# EAGLE board bl_dora2 (EAGLE 9.4.2)
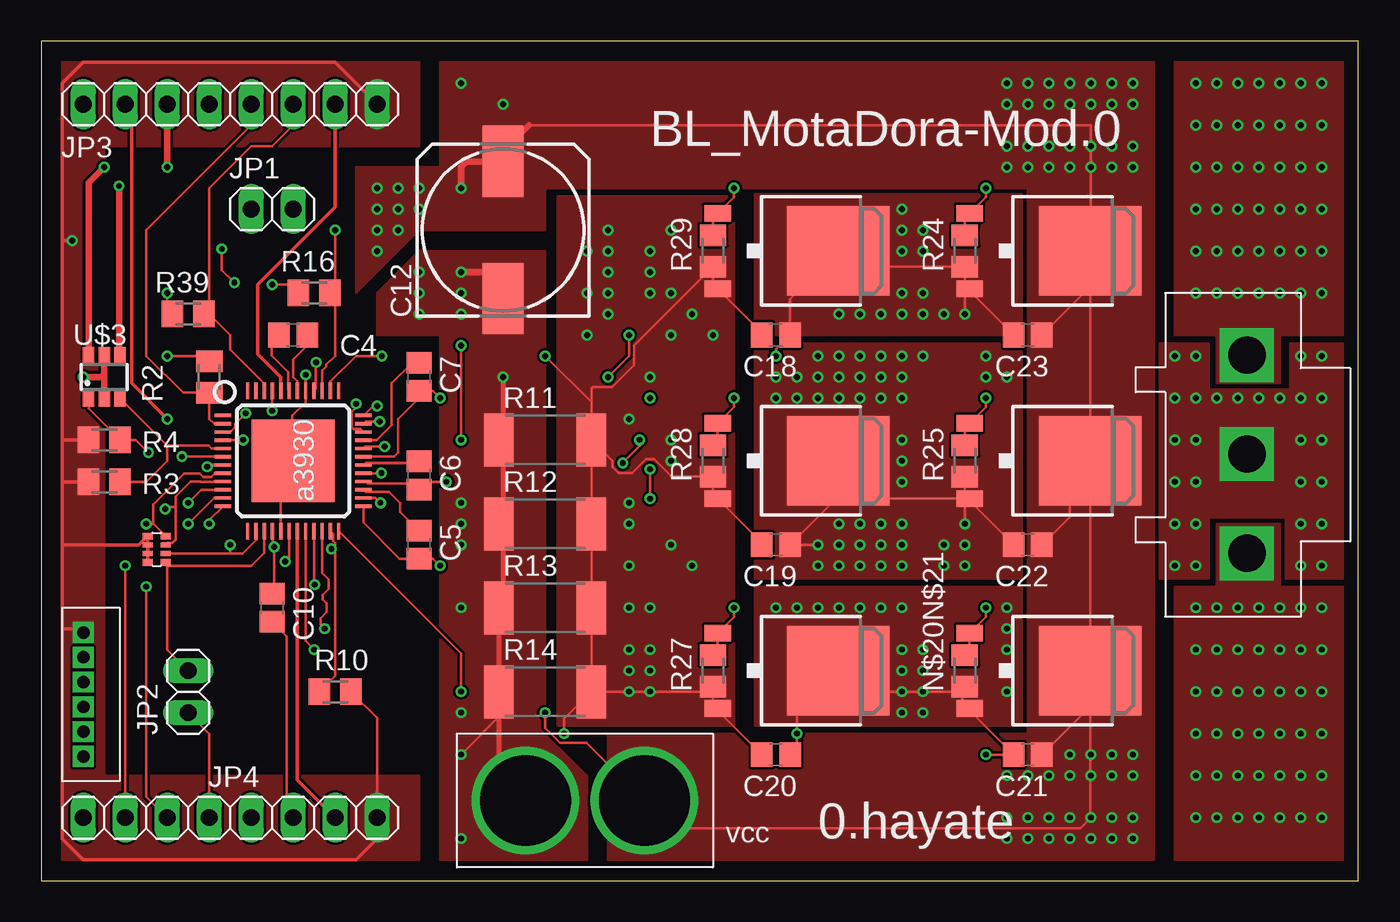
[diagram p0: board, top side]
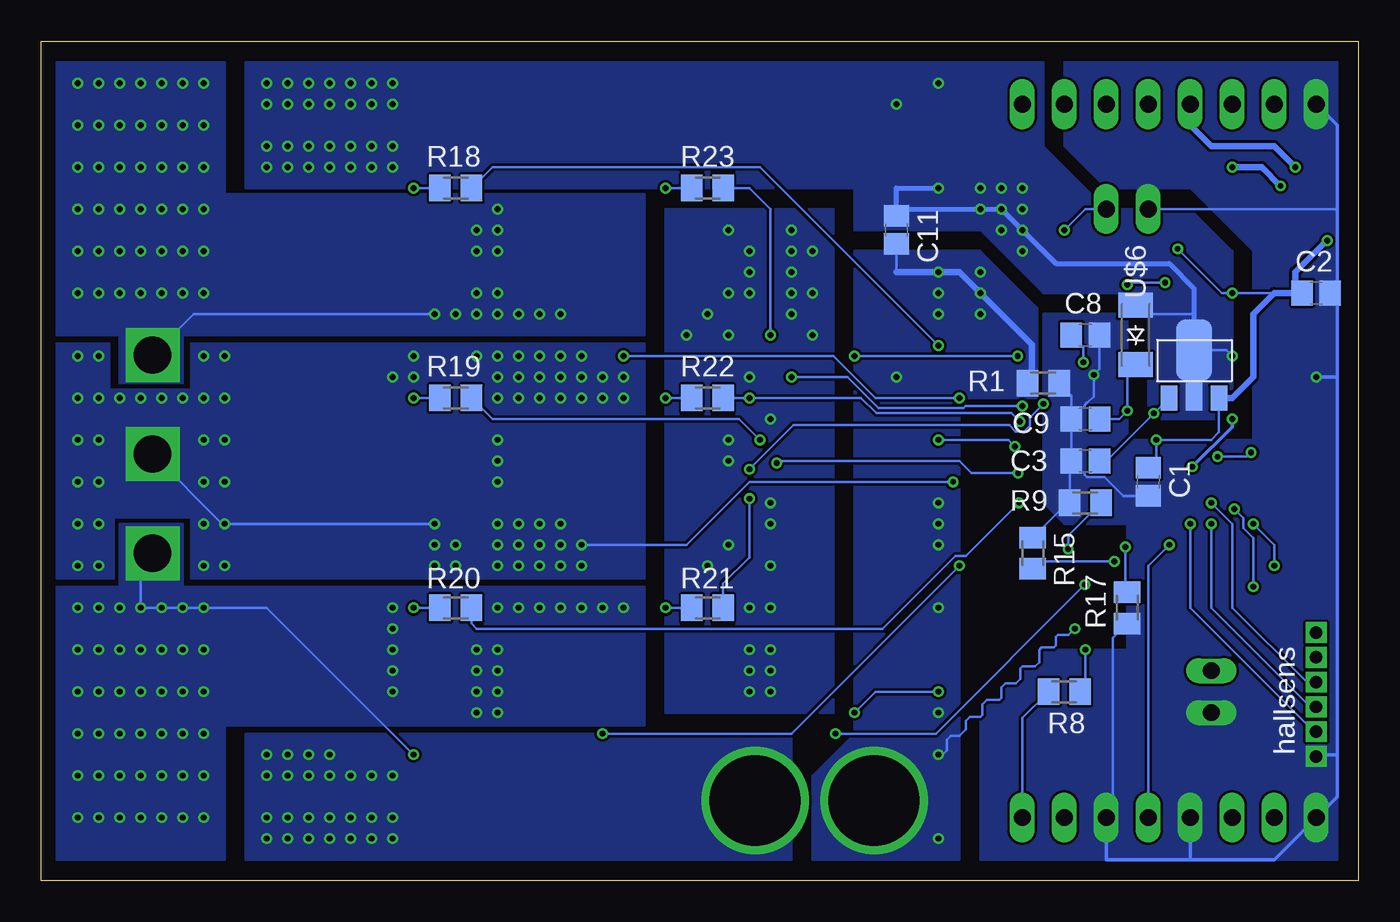
[diagram p1: board, bottom side, seen from below]

Size 79.68 x 50.79 mm. Coordinates in mm from the lower left corner, seen from the top.
Outline: 0,0 79.68,0 79.68,50.79 0,50.79 0,0
Copper layers (1*16): Top 0.035mm / dielectric 1.5mm / Bottom 0.035mm
Design rules "SeeedStudio_2layer_DRU_no_angle_20140221": minimum track width 6mil, minimum drill 12mil, track to track 6mil, track to pad 6mil, pad to pad 6mil, via to via 6mil, smd to smd 0mil, copper to edge 10mil, drill to drill 10mil, minimum pad ring 10mil, minimum via ring 6mil, stop-mask expansion 2mil, vias tented up to drill 100mil, thermal gap 10mil

## Footprints (pad centres in the part's own frame; a part is rotated, then mirrored left to right if it is on the bottom)
C2012 = smd 1.3 x 1.5: 1 -0.85,0; 2 0.85,0
153CLV-1012 = smd 4.3 x 2.5: + 4.15,0; - -4.15,0
1X02 = drill 1.016 long: 1 -1.27,0; 2 1.27,0
1X08 = drill 1.016 long: 1 -8.89,0; 2 -6.35,0; 3 -3.81,0; 4 -1.27,0; 5 1.27,0; 6 3.81,0; 7 6.35,0; 8 8.89,0
M2012 = smd 1.3 x 1.6: 1 -0.95,0; 2 0.95,0
R2512 = smd 1.8 x 3.2: 1 -2.8,0; 2 2.8,0
A3930 = smd 5 x 5: PAD 0,0 | smd 0.2 x 1: PIN1 -2.75,-4.25; PIN2 -2.25,-4.25; PIN3 -1.75,-4.25; PIN4 -1.25,-4.25; PIN5 -0.75,-4.25; PIN6 -0.25,-4.25; PIN7 0.25,-4.25; PIN8 0.75,-4.25; PIN9 1.25,-4.25; PIN10 1.75,-4.25; PIN11 2.25,-4.25; PIN12 2.75,-4.25; PIN25 2.75,4.25; PIN26 2.25,4.25; PIN27 1.75,4.25; PIN28 1.25,4.25; PIN29 0.75,4.25; PIN30 0.25,4.25; PIN31 -0.25,4.25; PIN32 -0.75,4.25; PIN33 -1.25,4.25; PIN34 -1.75,4.25; PIN35 -2.25,4.25; PIN36 -2.75,4.25 | smd 1 x 0.2: PIN13 4.25,-2.75; PIN14 4.25,-2.25; PIN15 4.25,-1.75; PIN16 4.25,-1.25; PIN17 4.25,-0.75; PIN18 4.25,-0.25; PIN19 4.25,0.25; PIN20 4.25,0.75; PIN21 4.25,1.25; PIN22 4.25,1.75; PIN23 4.25,2.25; PIN24 4.25,2.75; PIN37 -4.25,2.75; PIN38 -4.25,2.25; PIN39 -4.25,1.75; PIN40 -4.25,1.25; PIN41 -4.25,0.75; PIN42 -4.25,0.25; PIN43 -4.25,-0.25; PIN44 -4.25,-0.75; PIN45 -4.25,-1.25; PIN46 -4.25,-1.75; PIN47 -4.25,-2.25; PIN48 -4.25,-2.75
2SC5964 = smd 1 x 1.5: B 0,0; E 3,0 | smd 1 x 1.8: C 1.5,0.15 | smd 2.2 x 3.7: C@2 1.5,2.9
SSOT6_FET = smd 0.69 x 0.99: 1 -0.95,-1.3; 2 0,-1.3; 3 0.95,-1.3; 4 0.95,1.3; 5 0,1.3; 6 -0.95,1.3
1005X4RESISTOR = smd 0.4 x 0.6: 1 0.2,-0.8; 4 1.8,-0.8; 5 0.2,0.3; 8 1.8,0.3 | smd 0.3 x 0.6: 2 0.75,-0.8; 3 1.25,-0.8; 6 0.75,0.3; 7 1.25,0.3
SMD_DAIOD = smd 1.5 x 2.1: A 1.8,0; K -1.8,0
NP52N06SLG = smd 1 x 1.6: PIN1_G -2.28,-4.8; PIN3_S 2.28,-4.8 | smd 5.4 x 6.2: PIN2_D 0,2.5
ZH_6P = drill 0.75 square: PIN1 1.5,0; PIN2 3,0; PIN3 4.5,0; PIN4 6,0; PIN5 7.5,0; PIN6 9,0
XT60 = drill 5.5: P$1 11.35,4.05; P$2 4.15,4.05
VL_3P = drill 2.25 square: P$1 3.75,-3.25; P$2 9.75,-3.25; P$3 15.75,-3.25

## Placement (x,y rotation side)
C1  220n  [C2012]  12.7,24.13 270 bottom
C2  10u  [C2012]  2.54,35.56 0 bottom
C3  0.1u  [C2012]  16.51,25.4 180 bottom
C4  0.47u  [C2012]  15.24,33.02 180 top
C5  0.1u  [C2012]  22.86,20.32 270 top
C6  0.1u  [C2012]  22.86,24.51 270 top
C7  0.1u  [C2012]  22.86,30.48 270 top
C8  10u  [C2012]  16.51,33.02 0 bottom
C9  0.1u  [C2012]  16.51,27.94 180 bottom
C10  680p  [C2012]  13.97,16.51 270 top
C11  0.1u  [C2012]  27.94,39.37 270 bottom
C12  820u  [153CLV-1012]  27.94,39.37 90 top
C18  0.1u  [C2012]  44.45,33.02 180 top
C19  0.1u  [C2012]  44.45,20.32 180 top
C20  0.1u  [C2012]  44.45,7.62 180 top
C21  0.1u  [C2012]  59.69,7.62 180 top
C22  0.1u  [C2012]  59.69,20.32 180 top
C23  0.1u  [C2012]  59.69,33.02 180 top
JP1  [1X02]  13.97,40.64 0 top
JP2  [1X02]  8.89,11.43 90 top
JP3  [1X08]  11.43,46.99 0 top
JP4  [1X08]  11.43,3.81 0 top
N$20N$21  10k  [M2012]  55.88,12.7 90 top
R1  0  [M2012]  19.05,30.1 180 bottom
R2  33k  [M2012]  10.16,30.48 90 top
R3  4.7k  [M2012]  3.81,24.13 180 top
R4  4.7k  [M2012]  3.81,26.67 180 top
R8  33k  [M2012]  17.78,11.43 180 bottom
R9  1k  [M2012]  16.51,22.86 0 bottom
R10  4.7k  [M2012]  17.78,11.43 0 top
R11  20m  [R2512]  30.48,26.67 0 top
R12  20m  [R2512]  30.48,21.59 0 top
R13  20m  [R2512]  30.48,16.51 0 top
R14  20m  [R2512]  30.48,11.43 0 top
R15  100k  [M2012]  19.68,19.81 270 bottom
R16  10k  [M2012]  16.51,35.56 180 top
R17  47k  [M2012]  13.97,16.51 90 bottom
R18  10  [M2012]  54.61,41.91 180 bottom
R19  10  [M2012]  54.61,29.21 180 bottom
R20  10  [M2012]  54.61,16.51 180 bottom
R21  10  [M2012]  39.37,16.51 180 bottom
R22  10  [M2012]  39.37,29.21 180 bottom
R23  10  [M2012]  39.37,41.91 180 bottom
R24  10k  [M2012]  55.88,38.1 90 top
R25  10k  [M2012]  55.88,25.4 90 top
R27  10k  [M2012]  40.64,12.7 90 top
R28  10k  [M2012]  40.64,25.4 90 top
R29  10jk  [M2012]  40.64,38.1 90 top
R39  10k  [M2012]  8.89,34.29 180 top
U$1  A3930  [A3930]  15.24,25.4 270 top
U$2  2SC5964  [2SC5964]  11.43,29.21 0 bottom
U$3  SSOT6_FET  [SSOT6_FET]  3.81,30.48 0 top
U$5  10K  [1005X4RESISTOR]  6.73,19.05 90 top
U$6  SMD_DAIOD  [SMD_DAIOD]  13.46,33.02 90 bottom
U$7  NP52N06SLG  [NP52N06SLG]  60.96,38.1 270 top
U$8  NP52N06SLG  [NP52N06SLG]  45.72,38.1 270 top
U$9  NP52N06SLG  [NP52N06SLG]  60.96,25.4 270 top
U$10  NP52N06SLG  [NP52N06SLG]  45.72,25.4 270 top
U$11  NP52N06SLG  [NP52N06SLG]  60.96,12.7 270 top
U$12  NP52N06SLG  [NP52N06SLG]  45.72,12.7 270 top
U$23  ZH_6P  [ZH_6P]  2.54,16.51 270 top
U$24  XT60  [XT60]  40.64,8.89 180 top
U$25  VL_3P  [VL_3P]  76.2,35.56 270 top

## Library data of the parts
C1-C12 C18-C23 = rcl; SPICEPREFIX: C
JP1-JP4 = pinhead
N$20N$21 R1-R4 R8-R25 R27-R29 R39 = rcl; SPICEPREFIX: R
U$1-U$3 U$5-U$12 U$23-U$25 = user

## Nets
AGND: C1.2 C2.2 C3.2 C8.2 C9.2 C10.2 JP1.1 JP2.1 JP3.1 JP4.1 JP4.4 JP4.6 R1.1 R9.1 R15.1 R17.1 U$1.PAD U$1.PIN17 U$1.PIN41 U$3.2 U$3.5 U$23.PIN6
BRAKE: JP4.2 U$1.PIN8 U$5.4
COAST: JP3.6 R39.1 U$1.PIN46
CSOUT: JP4.7 U$1.PIN19
DIR: JP4.3 U$1.PIN9 U$5.3
DIRO: JP3.7 U$1.PIN44
ESF: JP1.2 R16.1 U$1.PIN39
FFO1: JP3.4 U$3.6
FFO2: JP3.3 U$3.4
GND: C11.2 C12.- R1.2 R11.1 R12.1 R13.1 R14.1 U$1.PIN22 U$24.P$1
H1: U$1.PIN10 U$23.PIN3
H2: U$1.PIN11 U$23.PIN4
H3: U$1.PIN12 U$23.PIN5
N$1: C3.1 U$1.PIN3 U$2.B
N$2: R3.1 U$1.PIN5 U$3.3
N$3: R4.1 U$1.PIN6 U$3.1
N$6: R9.2 R10.1 U$1.PIN23
N$7: R8.1 U$1.PIN20
N$8: C18.2 C19.2 C20.2 R11.2 R12.2 R13.2 R14.2 R27.1 R28.1 R29.1 U$1.PIN21 U$1.PIN38 U$8.PIN3_S U$10.PIN3_S U$12.PIN3_S
N$12: C4.1 U$1.PIN42
N$13: JP2.2 U$1.PIN15 U$5.1
N$14: C4.2 U$1.PIN43
N$15: R15.2 U$1.PIN18
N$16: C5.1 U$1.PIN27
N$17: C6.1 U$1.PIN30
N$18: C7.1 U$1.PIN33
N$19: C7.2 C18.1 C23.2 R24.1 U$1.PIN31 U$7.PIN3_S U$8.PIN2_D U$25.P$1
N$20: C6.2 C19.1 C22.2 R25.1 U$1.PIN28 U$9.PIN3_S U$10.PIN2_D U$25.P$2
N$21: C5.2 C20.1 C21.2 N$20N$21.1 U$1.PIN25 U$11.PIN3_S U$12.PIN2_D U$25.P$3
N$22: C8.1 U$1.PIN40
N$23: C9.1 U$1.PIN45 U$6.K
N$24: C10.1 R17.2 U$1.PIN16
N$25: R18.2 R24.2 U$7.PIN1_G
N$26: R19.2 R25.2 U$9.PIN1_G
N$27: N$20N$21.2 R20.2 U$11.PIN1_G
N$28: R21.2 R27.2 U$12.PIN1_G
N$29: R22.2 R28.2 U$10.PIN1_G
N$30: R23.2 R29.2 U$8.PIN1_G
N$31: R23.1 U$1.PIN36
N$32: R22.1 U$1.PIN35
N$33: R21.1 U$1.PIN34
N$35: R18.1 U$1.PIN32
N$36: R19.1 U$1.PIN29
N$37: R20.1 U$1.PIN26
PWM: JP4.5 U$1.PIN14 U$5.2
RESET: JP3.5 R2.1 U$1.PIN2
TACHO: JP3.2 U$1.PIN7
V5: C1.1 C2.1 JP3.8 JP4.8 R3.2 R4.2 R8.2 R10.2 R16.2 R39.2 U$1.PIN4 U$2.E U$5.5 U$5.6 U$5.7 U$5.8 U$23.PIN1
VCC: C11.1 C12.+ C21.1 C22.1 C23.1 R2.2 U$1.PIN24 U$2.C U$2.C@2 U$6.A U$7.PIN2_D U$9.PIN2_D U$11.PIN2_D U$24.P$2

## Tracks (layer width: path | path; a pad name or v marks a point on that pad's centre or on a via)
AGND  (via drill 0.35)
  Top 0.152: v16,30.61 16,29.66 U$1.PIN41 15.99,28.94 15.18,28.13 15.18,25.34 | JP2.1 10.16,8.89 JP4.4 | C10.2 14.86,14.77 14.86,4.19 JP4.6 | U$1.PIN17 14.49,24.65 15.18,25.34 | 15.18,25.34 U$1.PAD
  Top 0.406: U$3.5 3.81,30.48 | 3.81,30.48 U$3.2 | 3.81,30.48 v2.54,30.48
  Bottom 0.152: C3.2 16.54,24.58 16.54,24.55 16.41,24.42 15.35,24.42 14.21,23.28 C1.2 | C3.2 17.46,25.3 R9.1 17.59,22.86 R15.1 | C3.2 C9.2 | C9.2 16.54,28.76 16.54,28.79 16.41,28.92 16.38,28.92 16,29.3 v16,30.61 15.66,30.95 C8.2 | R17.1 14.86,14.67 14.86,4.19 JP4.6 | C9.2 17.36,29.36 R1.1 | JP1.1 1.27,40.64
  Bottom 0.2: JP4.6 15.24,1.27 10.16,1.27 | 10.16,1.27 5.08,1.27 JP4.1 1.27,5.08 1.27,7.62 | JP4.4 10.16,1.27 | 1.27,7.62 1.27,30.48 | 1.27,30.48 1.27,35.98 | 1.27,35.98 1.27,40.64 1.27,45.72 JP3.1 | U$23.PIN6 2.43,7.62 1.27,7.62 | C2.2 1.27,35.98 | v2.54,30.48 1.27,30.48
  pour Bottom (no thermals): 17.78,49.53 1.27,49.53 1.27,1.27 22.86,1.27 22.86,10.16 19.05,13.97 13.97,13.97 13.97,21.59 17.78,21.59 19.05,22.86 19.05,34.29 13.97,34.29 13.97,26.67 6.35,26.67 6.35,38.1 10.16,41.91 15.24,41.91 17.78,44.45
BRAKE  (via drill 0.35)
  Top 0.152: U$5.4 6.77,21.61 | 6.77,21.61 6.77,22.77 8.65,24.65 9.57,24.65 9.78,24.44 10.28,24.44 10.5,24.65 U$1.PIN8 | 6.77,21.61 6.75,21.59 v6.35,21.59 | v5.08,19.05 JP4.2
  Bottom 0.152: v6.35,21.59 5.08,20.32 v5.08,19.05
COAST
  Top 0.152: U$1.PIN46 13.49,30.07 11.43,32.13 11.43,33.02 10.16,34.29 R39.1 10.16,34.61 10.16,41.91 12.7,44.45 13.97,44.45 15.24,45.72 JP3.6
CSOUT
  Top 0.152: 15.49,19.31 15.49,19.3
  Top 0.203: U$1.PIN19 15.49,19.31 | 15.49,19.3 15.49,6.1 JP4.7
DIR  (via drill 0.35)
  Top 0.152: U$5.3 7.65,20.42 7.93,20.42 8.13,20.62 8.13,22.61 | U$1.PIN9 10.43,24.15 10.41,24.13 9.65,24.13 9.64,24.15 9.04,24.15 8.13,23.24 8.13,22.61 | JP4.3 6.35,5.08 v6.35,17.78 | v7.49,22.48 7.62,22.61 8.13,22.61
  Bottom 0.152: v6.35,17.78 6.35,20.73 6.96,21.34 6.96,21.94 v7.49,22.48
DIRO
  Top 0.152: U$1.PIN44 14.48,29.66
  Top 0.203: JP3.7 17.78,40.77 13.08,36.07 13.08,31.88 14.48,30.48 14.48,29.66
ESF  (via drill 0.35)
  Top 0.152: U$1.PIN39 16.99,30.86 17.24,31.12 17.24,31.21 17.78,31.75 17.78,35.24 R16.1 17.78,35.88 v17.78,39.37
  Bottom 0.152: v17.78,39.37 16.51,40.64 JP1.2
FFO1  (via drill 0.35)
  Top 0.406: U$3.6 2.86,42.23 v3.81,43.18
  Bottom 0.406: v3.81,43.18 5.08,44.45 8.89,44.45 10.16,45.72 JP3.4
FFO2  (via drill 0.35)
  Top 0.152: U$3.4 4.7,31.84
  Top 0.406: v4.7,42.04 4.7,31.84 | v7.62,43.18 JP3.3
  Bottom 0.406: v7.62,43.18 5.84,43.18 v4.7,42.04
GND  (via drill 0.35)
  Top 0.152: U$1.PIN22 16.99,18.63 17.4,18.22 17.4,17.65 17.02,17.27 17.02,17.02 17.27,16.76 17.27,16.26 16.89,15.88 16.89,15.49 v17.14,15.24 | v25.4,7.62 27.68,9.9 R14.1
  Top 0.305: v27.94,30.48 27.94,26.93 R11.1 27.94,26.41 27.94,20.32 27.68,20.58 R12.1 27.94,21.33 27.94,16.51 R13.1 R14.1 27.68,6.45 U$24.P$1
  Top 0.406: v25.4,36.83 27.94,36.83 C12.-
  Bottom 0.152: C11.2 27.94,36.83 | v25.4,7.62 25.15,7.62 24.89,7.87 24.89,8.51 24.64,8.76 24.13,8.76 23.75,9.14 23.75,9.65 23.5,9.91 22.86,9.91 22.73,10.03 22.73,10.67 22.48,10.92 21.72,10.92 21.59,11.05 21.59,11.68 21.34,11.94 20.7,11.94 20.45,12.19 20.45,12.83 20.32,12.95 19.56,12.95 19.3,13.21 19.3,13.97 19.18,14.1 18.41,14.1 18.29,14.22 18.29,14.73 18.16,14.86 17.53,14.86 v17.14,15.24
  Bottom 0.406: R1.2 19.75,30.35 19.75,32.45 v22.86,35.56 24.13,36.83 v25.4,36.83 27.94,36.83
  other vias: 22.86,36.83 22.86,34.29 25.4,35.56 25.4,34.29 25.4,22.86 25.4,21.59 25.4,20.32 25.4,16.51 25.4,10.16 25.4,2.54
  pour Top (no thermals): 22.86,38.1 30.48,38.1 30.48,8.89 33.02,6.35 33.02,1.27 24.13,1.27 24.13,33.02 20.32,33.02 20.32,35.56
  pour Bottom (no thermals): 19.43,34.67 22.86,38.1 30.48,38.1 30.48,8.89 33.02,6.35 33.02,1.27 24.13,1.27 24.13,29.21 19.43,29.21
H1  (via drill 0.35)
  Top 0.152: v8.89,22.86 9.68,23.65 U$1.PIN10
  Bottom 0.152: U$23.PIN3 3.12,12.01 7.62,16.51 7.62,21.59 v8.89,22.86
H2  (via drill 0.35)
  Top 0.152: U$1.PIN11 10.45,23.15 v8.89,21.59
  Bottom 0.152: U$23.PIN4 2.89,10.51 8.89,16.51 8.89,19.05 v8.89,21.59
H3  (via drill 0.35)
  Top 0.152: v10.16,21.59 10.16,21.82 U$1.PIN12
  Bottom 0.152: U$23.PIN5 2.66,9.01 10.16,16.51 v10.16,21.59
N$1  (via drill 0.35)
  Top 0.152: v12.37,28.27 11.72,27.63 11.72,27.45 11.41,27.15 U$1.PIN3
  Bottom 0.152: C3.1 15.24,25.4 v12.37,28.27 U$2.B
N$2
  Top 0.152: U$3.3 7.62,26.32 | U$1.PIN5 10.3,26.15 10.13,26.32 7.62,26.32 | R3.1 6.35,24.13 7.62,25.4 7.62,26.32
N$3  (via drill 0.35)
  Top 0.152: U$3.1 2.86,28.57 R4.1 5.71,26.67 v6.48,25.91 | U$1.PIN6 v8.51,25.65
  Bottom 0.152: v8.51,25.65 6.73,25.65 v6.48,25.91
N$6  (via drill 0.35)
  Top 0.152: U$1.PIN23 17.66,20.98 17.66,20.55 17.78,20.44 17.78,19.94 | R10.1 17.78,12.38 17.78,19.94 | v17.55,20.07 17.65,20.07 17.78,19.94
  Bottom 0.152: R9.2 17.55,20.87 v17.55,20.07
N$7  (via drill 0.35)
  Top 0.152: U$1.PIN20 15.99,14.49 v16.51,13.97
  Bottom 0.152: v16.51,13.97 16.51,11.75 R8.1
N$8  (via drill 0.35)
  Top 0.152: U$1.PIN38 17.49,30.19 19.05,31.75 v20.61,31.75 | v30.48,31.75 33.28,28.95 R11.2 | R14.2 R13.2 R12.2 R11.2 | R11.2 34.57,25.38 34.57,25.02 34.93,24.67 35.75,24.67 36.58,25.5 37.08,25.5 38.13,24.45 R28.1 40.64,23.4 U$10.PIN3_S 43.6,20.44 C19.2 | R14.2 v35.56,11.43 v36.83,11.43 40.32,11.43 R27.1 40.64,10.58 40.92,10.3 | R11.2 33.28,29.79 33.36,29.87 34.54,29.87 35.87,31.2 35.87,32.38 R29.1 40.64,36.1 U$8.PIN3_S 43.6,33.14 C18.2 | C20.2 40.92,10.3 | 40.92,10.3 U$12.PIN3_S | U$1.PIN21 16.51,21.13 16.51,17.91 v16.55,17.91 | v31.62,8.89 31.62,9.77 R14.2
  Bottom 0.152: v20.61,31.75 v30.48,31.75 | v16.55,17.91 25.56,8.89 v31.62,8.89
  other vias: 33.02,38.1 34.29,39.37 34.29,38.1 34.29,36.83 34.29,35.56 34.29,34.29 33.02,35.56 33.02,33.02 38.1,33.02 40.64,33.02 39.37,34.29 38.1,35.56 36.83,35.56 36.83,36.83 36.83,38.1 38.1,39.37 36.83,30.48 38.1,26.67 38.1,25.4 35.56,27.94 38.1,20.32 39.37,19.05 36.83,16.51 35.56,16.51 35.56,19.05 35.56,21.59 35.56,22.86 36.83,13.97 35.56,13.97 35.56,12.7 36.83,12.7
  pour Top (no thermals): 31.24,41.4 41.91,41.4 41.91,9.4 31.24,9.4
  pour Bottom (no thermals): 31.75,40.64 41.91,40.64 41.91,10.16 31.75,10.16
N$12
  Top 0.152: C4.1 16.09,32.38 15.24,31.54 15.24,30.48 15.49,30.23 U$1.PIN42
N$13
  Top 0.152: U$1.PIN15 13.49,19.84 12.7,19.05 7.73,19.05 U$5.1 7.62,19.16 7.62,13.97 JP2.2
N$14
  Top 0.152: C4.2 13.94,32.57 13.94,32.17 13.94,31.78 14.94,30.79 14.94,29.7 U$1.PIN43
N$15  (via drill 0.35)
  Top 0.152: U$1.PIN18 14.99,19.53 v14.76,19.3
  Bottom 0.152: R15.2 19.24,19.3 v14.76,19.3
N$16
  Top 0.152: C5.1 21.72,22.31 21.72,22.86 21.05,23.52 19.62,23.52 U$1.PIN27
N$17
  Top 0.152: C6.1 22.86,25.27 19.61,25.27 U$1.PIN30
N$18
  Top 0.152: C7.1 22.44,31.33 21.21,30.1 21.21,27.56 20.3,26.65 U$1.PIN33
N$19  (via drill 0.35)
  Top 0.152: U$1.PIN31 21.34,25.65 21.59,25.91 21.59,27.94 22.86,29.21 C7.2 23.71,29.63 v24.13,29.21 | v44.45,31.74 44.45,32.15 44.48,32.17 44.48,32.2 C18.1 45.3,35.18 U$8.PIN2_D 49.17,37.15 R24.1 55.88,36.1 U$7.PIN3_S | C23.2 56.16,35.7 U$7.PIN3_S | U$7.PIN3_S 55.88,35.54 v55.88,34.29
  Bottom 0.152: v24.13,29.21 29.21,29.21 31.75,31.75 v44.44,31.75 v44.45,31.74 | v55.88,34.29 64.77,34.29 66.04,34.29 70.47,34.29 U$25.P$1
  other vias: 52.07,40.64 52.07,39.37 53.34,39.37 53.34,38.1 52.07,38.1 52.07,35.56 53.34,35.56 54.61,34.29 53.34,34.29 52.07,34.29 50.8,34.29 49.53,34.29 48.26,34.29 69.85,35.56 71.12,35.56 72.39,35.56 73.66,35.56 74.93,35.56 76.2,35.56 77.47,35.56 77.47,38.1 76.2,38.1 74.93,38.1 73.66,38.1 72.39,38.1 71.12,38.1 69.85,38.1 69.85,40.64 71.12,40.64 72.39,40.64 73.66,40.64 74.93,40.64 76.2,40.64 77.47,40.64 77.47,43.18 76.2,43.18 74.93,43.18 73.66,43.18 72.39,43.18 71.12,43.18 69.85,43.18 69.85,45.72 71.12,45.72 72.39,45.72 73.66,45.72 74.93,45.72 76.2,45.72 77.47,45.72 77.47,48.26 76.2,48.26 74.93,48.26 73.66,48.26 72.39,48.26 71.12,48.26 69.85,48.26
  pour Top (no thermals): 43.18,33.02 59.31,33.02 59.31,41.53 43.18,41.53
  pour Top (no thermals): 71.12,30.1 74.93,30.1 74.93,33.02 78.74,33.02 78.74,49.53 68.58,49.53 68.58,33.02 71.12,33.02
  pour Bottom (no thermals): 43.18,33.02 71.12,33.02 71.12,30.1 74.93,30.1 74.93,33.02 78.74,33.02 78.74,49.53 68.58,49.53 68.58,41.53 43.18,41.53
N$20  (via drill 0.35)
  Top 0.152: U$1.PIN28 19.62,24.15 19.74,24.02 22.5,24.02 C6.2 23.33,24.13 v24.51,24.13 | v46.99,20.32 C19.1 48.22,23.24 48.22,24.13 | 48.22,24.13 U$10.PIN2_D | C22.2 56.16,23 U$9.PIN3_S | U$9.PIN3_S | U$9.PIN3_S 55.88,23.4 R25.1 | U$9.PIN3_S 49.23,23.12 48.22,24.13 | v55.88,21.59 55.88,22.86 U$9.PIN3_S
  Bottom 0.152: v24.51,24.13 36.83,24.13 40.64,20.32 v46.99,20.32 | U$25.P$2 68.73,21.59 v68.58,21.59 v55.88,21.59
  other vias: 58.42,30.48 57.15,31.75 57.15,30.48 53.34,31.75 52.07,31.75 52.07,30.48 52.07,29.21 50.8,29.21 50.8,30.48 50.8,31.75 49.53,31.75 49.53,30.48 49.53,29.21 48.26,29.21 48.26,30.48 48.26,31.75 46.99,31.75 46.99,30.48 46.99,29.21 45.72,29.21 45.72,30.48 44.45,30.48 44.45,29.21 52.07,26.67 52.07,25.4 52.07,24.13 48.26,21.59 49.53,21.59 50.8,21.59 52.07,21.59 52.07,20.32 50.8,20.32 49.53,20.32 48.26,20.32 46.99,19.05 49.53,19.05 48.26,19.05 50.8,19.05 52.07,19.05 54.61,20.32 55.88,20.32 55.88,19.05 54.61,19.05 68.58,31.75 69.85,31.75 69.85,29.21 68.58,29.21 71.12,29.21 72.39,29.21 73.66,29.21 74.93,29.21 76.2,29.21 77.47,29.21 77.47,31.75 76.2,31.75 76.2,26.67 77.47,26.67 77.47,24.13 76.2,24.13 76.2,21.59 77.47,21.59 77.47,19.05 76.2,19.05 69.85,24.13 68.58,24.13 69.85,26.67 68.58,26.67 69.85,21.59 69.85,19.05 68.58,19.05
  pour Top (no thermals): 43.18,18.29 59.31,18.29 59.31,32.51 43.18,32.51
  pour Bottom (no thermals): 43.18,32.51 70.61,32.51 70.61,29.72 75.56,29.72 75.56,32.51 78.74,32.51 78.74,18.29 75.31,18.29 75.31,21.97 70.61,21.97 70.61,18.29 43.18,18.29
  pour Top (no thermals): 67.69,32.51 70.61,32.51 70.61,29.72 75.56,29.72 75.56,32.51 78.74,32.51 78.74,18.29 75.31,18.29 75.31,21.97 70.61,21.97 70.61,18.29 67.69,18.29
N$21  (via drill 0.35)
  Top 0.152: U$1.PIN25 19.49,21.66 21.68,19.47 C5.2 23.71,19.47 v24.13,19.05 | C20.1 45.72,8.04 v45.72,8.89 45.72,10.2 U$12.PIN2_D 49.49,11.43 v52.07,11.43 v53.34,11.43 55.56,11.43 55.72,11.59 | N$20N$21.1 55.72,11.59 | 55.72,11.59 55.72,10.86 U$11.PIN3_S 56.16,10.3 C21.2 v57.15,7.62
  Bottom 0.152: v24.13,19.05 34.29,8.89 v45.72,8.89 | v57.15,7.62 66.04,16.51 v69.85,16.51 v71.12,16.51 v72.39,16.51 v73.66,16.51 73.66,19.1 U$25.P$3
  other vias: 44.45,16.51 45.72,16.51 46.99,16.51 48.26,16.51 49.53,16.51 50.8,16.51 52.07,16.51 58.42,16.51 58.42,15.24 58.42,13.97 58.42,12.7 58.42,11.43 53.34,10.16 52.07,10.16 53.34,12.7 52.07,12.7 53.34,13.97 52.07,13.97 69.85,3.81 71.12,3.81 72.39,3.81 73.66,3.81 74.93,3.81 76.2,3.81 77.47,3.81 77.47,6.35 76.2,6.35 74.93,6.35 73.66,6.35 72.39,6.35 71.12,6.35 69.85,6.35 74.93,16.51 76.2,16.51 77.47,16.51 77.47,13.97 76.2,13.97 74.93,13.97 73.66,13.97 72.39,13.97 71.12,13.97 69.85,13.97 69.85,11.43 71.12,11.43 72.39,11.43 73.66,11.43 74.93,11.43 76.2,11.43 77.47,11.43 77.47,8.89 76.2,8.89 74.93,8.89 73.66,8.89 72.39,8.89 71.12,8.89 69.85,8.89
  pour Top (no thermals): 43.18,17.78 59.31,17.78 59.31,9.4 43.18,9.4
  pour Top (no thermals): 68.58,1.27 78.74,1.27 78.74,17.78 74.93,17.78 74.93,21.59 71.12,21.59 71.12,17.78 68.58,17.78
  pour Bottom (no thermals): 43.18,17.78 71.12,17.78 71.12,21.59 74.93,21.59 74.93,17.78 78.74,17.78 78.74,1.27 68.58,1.27 68.58,9.4 43.18,9.4
N$22  (via drill 0.35)
  Top 0.152: v16.64,31.37 16.61,31.34 16.61,29.77 U$1.PIN40
  Bottom 0.152: C8.1 16.64,32.3 v16.64,31.37
N$23  (via drill 0.35)
  Top 0.152: v13.97,28.43 13.97,29.63 U$1.PIN45
  Bottom 0.152: C9.1 14.46,27.94 v13.97,28.43 13.97,30.71 U$6.K
N$24  (via drill 0.35)
  Top 0.152: U$1.PIN16 13.99,20.3 v14.1,20.19 14.1,17.49 C10.1
  Bottom 0.152: v14.1,20.19 14.1,17.59 R17.2
N$25  (via drill 0.35)
  Top 0.152: R24.2 55.88,40.1 U$7.PIN1_G 57.15,41.37 v57.15,41.91
  Bottom 0.152: R18.2 v57.15,41.91
N$26  (via drill 0.35)
  Top 0.152: R25.2 55.88,27.4 U$9.PIN1_G 57.15,28.67 v57.15,29.21
  Bottom 0.152: v57.15,29.21 R19.2
N$27  (via drill 0.35)
  Top 0.152: v57.15,16.51 57.15,15.97 U$11.PIN1_G 56.16,13.93 N$20N$21.2
  Bottom 0.152: R20.2 v57.15,16.51
N$28  (via drill 0.35)
  Top 0.152: v41.91,16.51 41.91,15.97 U$12.PIN1_G 40.92,13.93 R27.2
  Bottom 0.152: R21.2 v41.91,16.51
N$29  (via drill 0.35)
  Top 0.152: v41.91,29.21 41.91,28.67 U$10.PIN1_G 40.92,26.63 R28.2
  Bottom 0.152: R22.2 v41.91,29.21
N$30  (via drill 0.35)
  Top 0.152: R29.2 40.64,40.1 U$8.PIN1_G 41.91,41.37 v41.91,41.91
  Bottom 0.152: v41.91,41.91 R23.2
N$31  (via drill 0.35)
  Top 0.152: v20.32,28.72 20.06,28.72 U$1.PIN36 | v34.29,30.48 35.56,31.75 v35.56,33.02
  Bottom 0.152: v34.29,30.48 30.91,30.48 29.03,28.6 23.88,28.6 23.76,28.72 v20.32,28.72 | v35.56,33.02 35.56,40.64 36.83,41.91 R23.1
N$32  (via drill 0.35)
  Top 0.152: U$1.PIN35 19.62,27.79 v20.48,27.79
  Bottom 0.152: v20.48,27.79 20.99,28.3 29.16,28.3 30.07,29.21 v36.83,29.21 R22.1
N$33  (via drill 0.35)
  Top 0.152: U$1.PIN34 19.32,27.32 18.89,27.32 18.76,27.45 18.76,28.34 19.05,28.63 v19.05,28.85 | v36.83,24.89 v36.83,23.11
  Bottom 0.152: v19.05,28.85 19.87,28.03 19.87,27.53 20.22,27.18 20.73,27.18 21.11,27.56 34.16,27.56 v36.83,24.89 | v36.83,23.11 36.83,19.56 38.42,17.97 R21.1
N$35  (via drill 0.35)
  Top 0.152: U$1.PIN32 19.6,26.26 v20.77,26.26 | v25.4,26.67 v25.4,32.38
  Bottom 0.152: v20.77,26.26 21.18,26.67 v25.4,26.67 | v25.4,32.38 36.2,43.18 44.45,43.18 46.99,43.18 49.53,43.18 52.07,43.18 52.39,43.18 R18.1
N$36  (via drill 0.35)
  Top 0.152: U$1.PIN29 20.56,24.65 v20.57,24.67 | v35.18,25.27 36.2,26.29 v36.2,26.67
  Bottom 0.152: v20.57,24.67 23.4,24.67 24.13,25.4 35.05,25.4 v35.18,25.27 | v36.2,26.67 37.47,27.94 52.39,27.94 R19.1
N$37  (via drill 0.35)
  Top 0.152: U$1.PIN26 20.23,23.15 v20.52,22.86
  Bottom 0.152: v20.52,22.86 23.72,19.66 24.38,19.66 28.8,15.24 53.34,15.24 53.66,15.56 R20.1
PWM  (via drill 0.35)
  Top 0.152: U$5.2 11.43,19.8 | 11.43,19.8 12.18,19.8 12.99,20.61 U$1.PIN14 | 11.43,19.8 v11.43,20.32
  Bottom 0.152: v11.43,20.32 12.7,19.05 JP4.5
RESET
  Top 0.152: JP3.5 12.7,45.72 6.35,39.37 6.35,31.75 8.57,29.53 R2.1 10.16,27.94 10.45,27.65 U$1.PIN2
TACHO  (via drill 0.35)
  Top 0.152: 5.46,46.61 JP3.2
  Top 0.203: v10.03,25.04 10.14,25.15 U$1.PIN7 | v7.62,27.94 5.46,30.1 5.46,46.61
  Bottom 0.203: v10.03,25.04 7.62,27.46 v7.62,27.94
V5  (via drill 0.35)
  Top 0.152: v12.21,26.67 12.19,26.65 U$1.PIN4 | R10.2 20.32,9.84 JP4.8 | R39.2 7.62,34.61 v7.62,35.56 | R16.2 15.05,36.07 v13.97,36.07 | v11.68,36.2 10.92,36.96 v10.92,38.23
  Top 0.2: JP3.8 17.78,49.53 2.54,49.53 1.27,48.26 1.27,38.73 | JP4.8 20.32,2.54 19.05,1.27 2.54,1.27 1.27,2.54 1.27,15.24 | 1.27,38.73 1.27,26.67 | 1.27,26.67 1.27,24.13 | 1.27,24.13 1.27,20.32 | 1.27,20.32 1.27,15.24 | U$23.PIN1 2.31,15.24 1.27,15.24 | R4.2 1.27,26.67 | R3.2 1.27,24.13 | U$5.5 U$5.6 U$5.7 U$5.8 5.9,20.32 1.27,20.32 | v1.87,38.73 1.27,38.73
  Bottom 0.152: C1.1 12.21,25.47 v12.21,26.67 8.89,26.67 8.43,27.13 U$2.E | R10.2 20.32,9.84 JP4.8 | 5.08,35.56 v7.62,35.56 8.26,35.56 v10.92,38.23 | v13.97,36.07 13.84,36.2 v11.68,36.2
  Bottom 0.2: 1.91,38.73 v1.87,38.73
  Bottom 0.406: U$2.E 7.62,29.21 6.35,30.48 6.35,34.29 5.08,35.56 C2.1 3.81,35.98 3.81,36.83 1.91,38.73
  pour Top (no thermals): 20.32,44.45 22.86,44.45 22.86,49.53 1.27,49.53 1.27,1.27 22.86,1.27 22.86,6.35 3.81,6.35 3.81,44.45
VCC  (via drill 0.35)
  Top 0.152: R2.2 9.84,31.75 v7.62,31.75 | 29.51,45.72 63.5,45.72 v63.5,44.45 v63.5,43.18 63.5,38.14 U$7.PIN2_D | U$7.PIN2_D U$9.PIN2_D | U$9.PIN2_D U$11.PIN2_D | U$11.PIN2_D 63.46,11.47 63.5,11.43 63.5,12.66 U$11.PIN2_D | U$11.PIN2_D 63.46,3.85 v63.5,3.81 62.87,3.17 38.16,3.17 U$24.P$2 33,8.33 31.39,8.33 30.48,9.25 v30.48,10.16 | C21.1 63.46,10.54 U$11.PIN2_D | C22.1 62.23,22.01 62.23,25.4 U$9.PIN2_D | C23.1 63.46,35.94 U$7.PIN2_D | U$1.PIN24 25.4,13.74 v25.4,11.43
  Top 0.406: v25.4,41.91 25.4,43.18 25.74,43.52 C12.+ 27.94,44.15 29.51,45.72
  Bottom 0.152: v7.62,31.75 7.98,32.11 U$2.C@2 U$2.C | U$6.A 13.08,34.82 12.55,34.29 9.93,34.29 | v25.4,11.43 29.21,11.43 v30.48,10.16
  Bottom 0.305: U$2.C@2 9.93,34.29 9.93,35.84 11.43,37.34 18.29,37.34 v20.32,39.37 v21.59,40.64 v22.86,40.64 27.52,40.64 C11.1 27.94,41.91 v25.4,41.91
  other vias: 27.94,46.99 22.86,41.91 21.59,41.91 20.32,41.91 20.32,40.64 20.32,38.1 21.59,39.37 25.4,48.26 58.42,48.26 59.69,48.26 60.96,48.26 62.23,48.26 63.5,48.26 64.77,48.26 66.04,48.26 66.04,46.99 64.77,46.99 63.5,46.99 62.23,46.99 60.96,46.99 59.69,46.99 58.42,46.99 58.42,44.45 59.69,44.45 60.96,44.45 62.23,44.45 64.77,44.45 66.04,44.45 66.04,43.18 64.77,43.18 62.23,43.18 60.96,43.18 59.69,43.18 58.42,43.18 63.5,6.35 63.5,7.62 62.23,7.62 62.23,6.35 60.96,6.35 59.69,6.35 58.42,6.35 64.77,7.62 66.04,7.62 66.04,6.35 64.77,6.35 66.04,3.81 64.77,3.81 62.23,3.81 60.96,3.81 59.69,3.81 58.42,3.81 58.42,2.54 59.69,2.54 60.96,2.54 62.23,2.54 63.5,2.54 64.77,2.54 66.04,2.54
  pour Bottom (no thermals): 7.62,27.94 12.7,27.94 12.7,34.29 13.97,35.56 19.05,35.56 22.86,39.37 30.48,39.37 30.48,49.53 19.05,49.53 19.05,44.45 15.24,40.64 10.16,40.64 7.62,38.1
  pour Top (no thermals): 24.13,49.53 67.31,49.53 67.31,1.27 34.29,1.27 34.29,8.89 59.69,8.89 59.69,41.91 30.48,41.91 30.48,39.37 22.86,39.37 19.05,35.56 19.05,43.18 24.13,43.18
  pour Bottom (no thermals): 34.29,1.27 34.29,8.89 67.31,8.89 67.31,1.27
  pour Bottom (no thermals): 30.48,49.53 30.48,41.91 67.31,41.91 67.31,49.53

## Text on the board
tNames: BL_MotaDora-Mod.0 | 0.hayate | vcc
bNames: hallsens